# EAGLE board arduino_isp_shield (EAGLE 7.2.0)
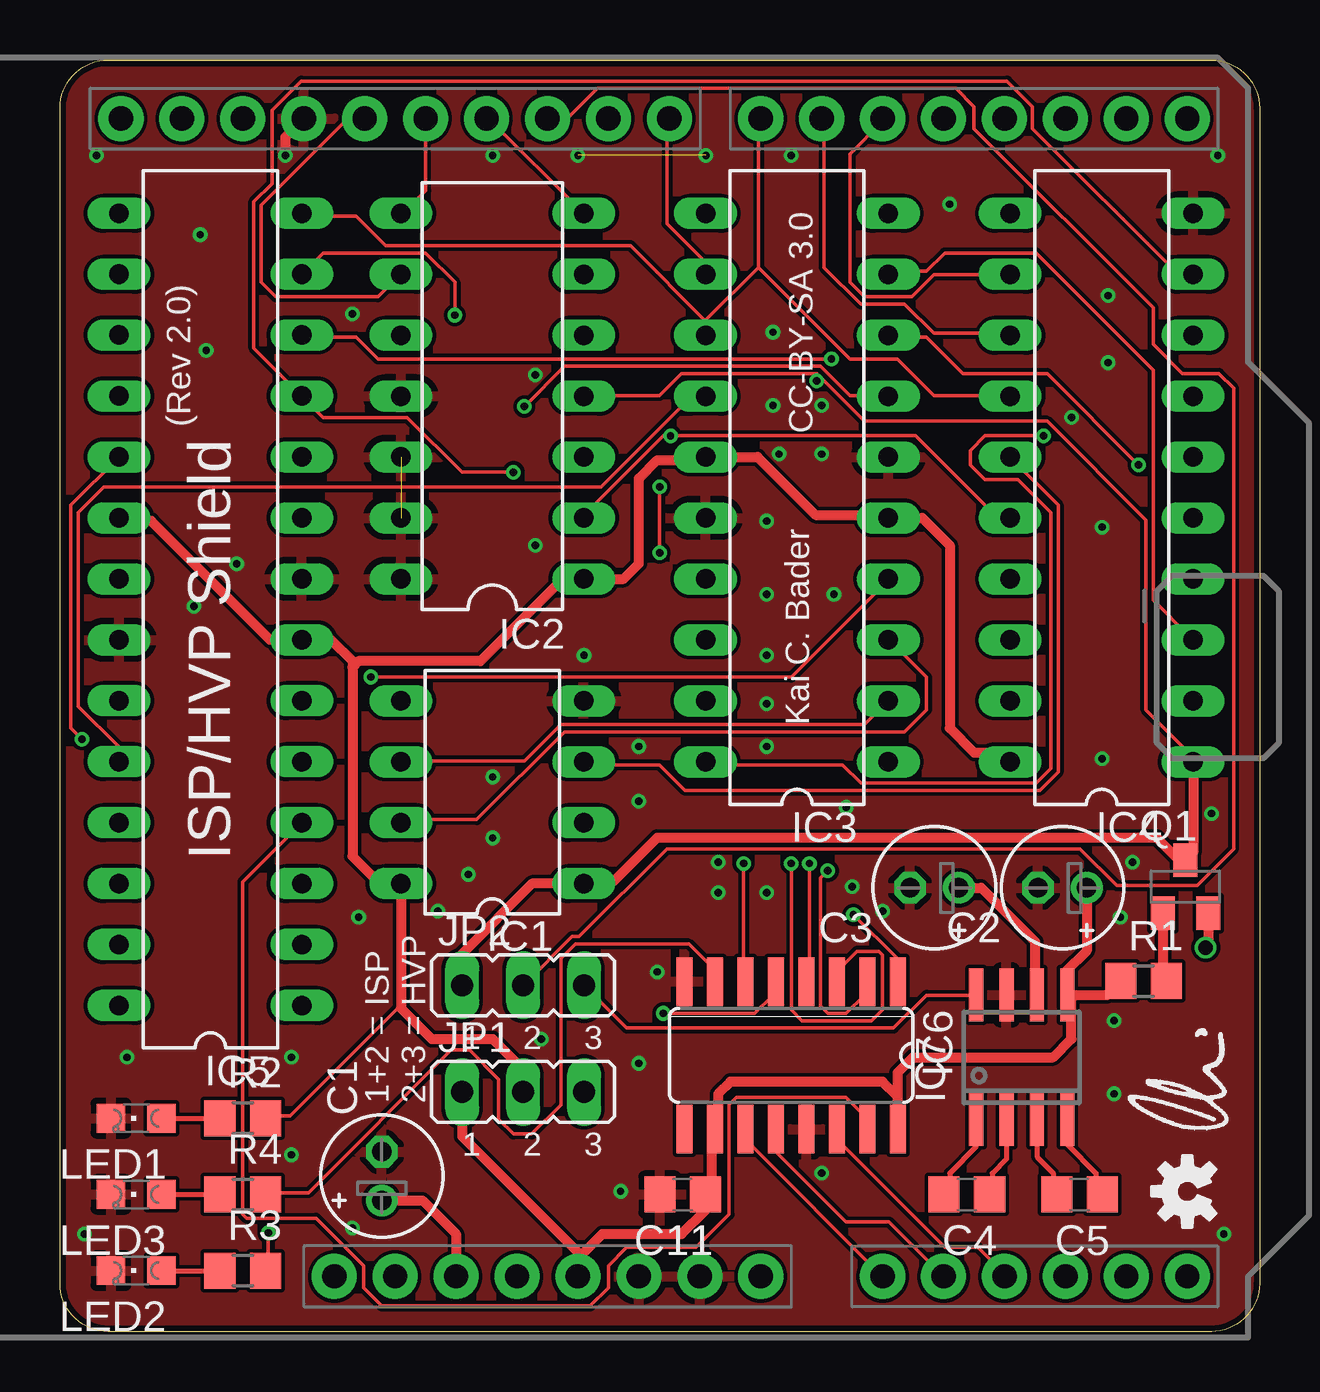
[diagram p0: board, top side]
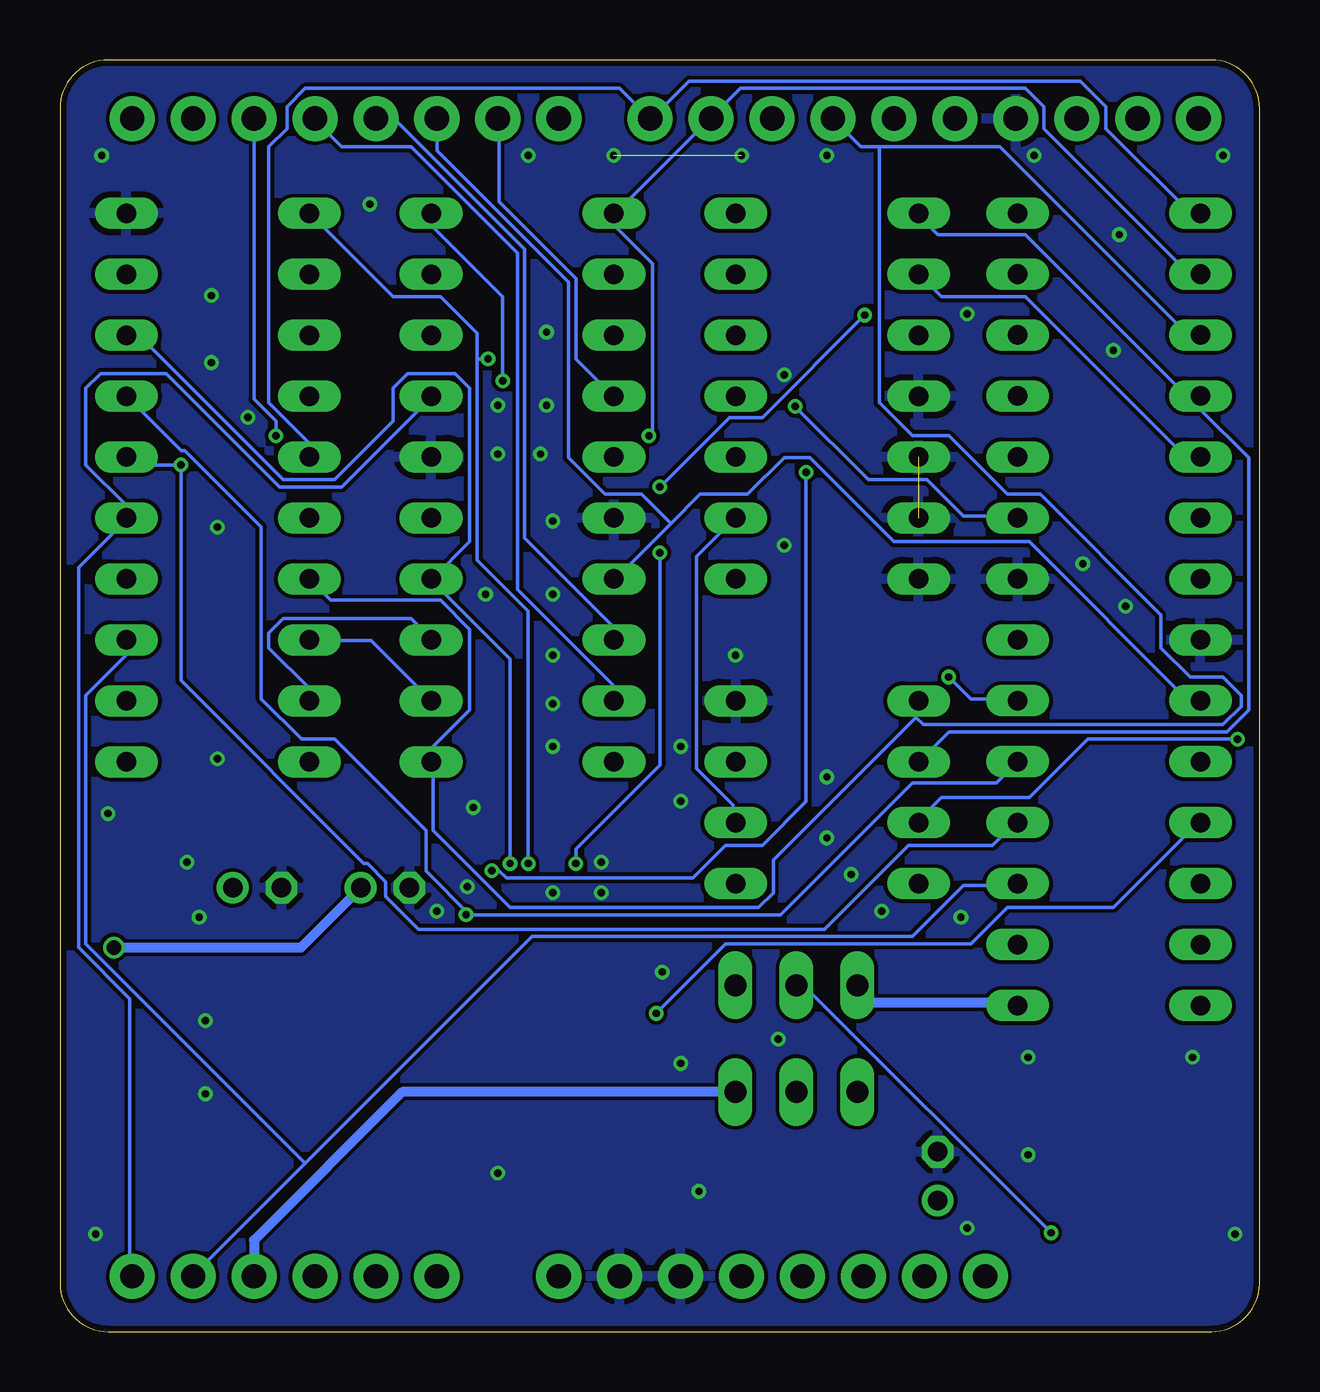
[diagram p1: board, bottom side, seen from below]

Size 50 x 53 mm. Coordinates in mm from the lower left corner, seen from the top.
Outline: 0,2 0,51 arc-90 2,53 48,53 arc-90 50,51 50,2 arc-90 48,0 2,0 arc-90 0,2
Copper layers (1*16): Top 0.035mm / dielectric 1.5mm / Bottom 0.035mm
Design rules "SeeedStudio_2layer_DRU_no_angle_20140221": minimum track width 6mil, minimum drill 12mil, track to track 6mil, track to pad 6mil, pad to pad 6mil, via to via 6mil, smd to smd 0mil, copper to edge 10mil, drill to drill 10mil, minimum pad ring 10mil, minimum via ring 6mil, stop-mask expansion 2mil, vias tented up to drill 100mil, thermal gap 10mil

## Footprints (pad centres in the part's own frame; a part is rotated, then mirrored left to right if it is on the bottom)
E2-5 = drill 0.813 pad 1.27: + -1.016,0 | drill 0.813 pad 1.27 octagon: - 1.016,0
C0805 = smd 1.3 x 1.5: 1 -0.95,0; 2 0.95,0
DIL08 = drill 0.813 long: 1 -3.81,-3.81; 2 -1.27,-3.81; 3 1.27,-3.81; 4 3.81,-3.81; 5 3.81,3.81; 6 1.27,3.81; 7 -1.27,3.81; 8 -3.81,3.81
DIL14 = drill 0.813 long: 1 -7.62,-3.81; 2 -5.08,-3.81; 3 -2.54,-3.81; 4 0,-3.81; 5 2.54,-3.81; 6 5.08,-3.81; 7 7.62,-3.81; 8 7.62,3.81; 9 5.08,3.81; 10 2.54,3.81; 11 0,3.81; 12 -2.54,3.81; 13 -5.08,3.81; 14 -7.62,3.81
DIL20 = drill 0.813 long: 1 -11.43,-3.81; 2 -8.89,-3.81; 3 -6.35,-3.81; 4 -3.81,-3.81; 5 -1.27,-3.81; 6 1.27,-3.81; 7 3.81,-3.81; 8 6.35,-3.81; 9 8.89,-3.81; 10 11.43,-3.81; 11 11.43,3.81; 12 8.89,3.81; 13 6.35,3.81; 14 3.81,3.81; 15 1.27,3.81; 16 -1.27,3.81; 17 -3.81,3.81; 18 -6.35,3.81; 19 -8.89,3.81; 20 -11.43,3.81
DIL28 = drill 0.813 long: 1 -11.43,-3.81; 2 -8.89,-3.81; 3 -6.35,-3.81; 4 -3.81,-3.81; 5 -1.27,-3.81; 6 1.27,-3.81; 7 3.81,-3.81; 8 6.35,-3.81; 9 8.89,-3.81; 10 11.43,-3.81; 11 13.97,-3.81; 12 16.51,-3.81; 13 19.05,-3.81; 14 21.59,-3.81; 15 21.59,3.81; 16 19.05,3.81; 17 16.51,3.81; 18 13.97,3.81; 19 11.43,3.81; 20 8.89,3.81; 21 6.35,3.81; 22 3.81,3.81; 23 1.27,3.81; 24 -1.27,3.81; 25 -3.81,3.81; 26 -6.35,3.81; 27 -8.89,3.81; 28 -11.43,3.81
SO16 = smd 0.66 x 2.032: 1 -4.445,-3.073; 2 -3.175,-3.073; 3 -1.905,-3.073; 4 -0.635,-3.073; 5 0.635,-3.073; 6 1.905,-3.073; 7 3.175,-3.073; 8 4.445,-3.073; 9 4.445,3.073; 10 3.175,3.073; 11 1.905,3.073; 12 0.635,3.073; 13 -0.635,3.073; 14 -1.905,3.073; 15 -3.175,3.073; 16 -4.445,3.073
SO08 = smd 0.6 x 2.2: 1 -1.905,-2.6; 2 -0.635,-2.6; 3 0.635,-2.6; 4 1.905,-2.6; 5 1.905,2.6; 6 0.635,2.6; 7 -0.635,2.6; 8 -1.905,2.6
JP2 = drill 0.914 long: 1 -2.54,0; 2 0,0; 3 2.54,0
CHIPLED_0805 = smd 1.2 x 1.2: A 0,-1.05; C 0,1.05
UNO_R3_SHIELD = drill 1.016 pad 1.88: 3.3V 50.8,26.67; 5V 50.8,29.21; A0 50.8,41.91; A1 50.8,44.45; A2 50.8,46.99; A3 50.8,49.53; A4 50.8,52.07; A5 50.8,54.61; AREF 2.54,15.24; D2 2.54,49.53; D3 2.54,46.99; D4 2.54,44.45; D5 2.54,41.91; D6 2.54,39.37; D7 2.54,36.83; D8 2.54,33.02; D9 2.54,30.48; D10 2.54,27.94; D11 2.54,25.4; D12 2.54,22.86; D13 2.54,20.32; GND@0 50.8,31.75; GND@1 50.8,34.29; GND@2 2.54,17.78; IOREF 50.8,21.59; NC 50.8,19.05; RES 50.8,24.13; RX 2.54,54.61; SCL 2.54,10.16; SDA 2.54,12.7; TX 2.54,52.07; VIN 50.8,36.83
SOT23-BEC = smd 1 x 1.4: B -0.95,-1.1; C 0,1.1; E 0.95,-1.1
R0805 = smd 1.3 x 1.5: 1 -0.95,0; 2 0.95,0

## Placement (x,y rotation side)
C1  10uF  [E2-5]  13.41,6.48 90 top
C2  4.7uF  [E2-5]  41.78,18.5 180 top
C3  4.7uF  [E2-5]  36.45,18.5 180 top
C4  0.22uF  [C0805]  37.8,5.71 180 top
C5  0.22uF  [C0805]  42.5,5.71 180 top
C11  0.1uF  [C0805]  25.95,5.71 180 top
IC1  ATtiny13/15/25/45/85  [DIL08]  18.02,22.48 90 top
IC2  ATtiny24/44/84  [DIL14]  18.02,38.99 90 top
IC3  TINY26/261/461/861  [DIL20]  30.72,35.18 90 top
IC4  ATtiny2313/4313  [DIL20]  43.42,35.18 90 top
IC5  ATMEGA328  [DIL28]  6.27,25.02 90 top
IC6  74HCT595D  [SO16]  30.48,11.51 180 top
IC7  MAX662A  [SO08]  40.09,11.43 0 top
JP1  [JP2]  19.3,9.99 0 top
JP2  [JP2]  19.3,14.43 0 top
LED1  [CHIPLED_0805]  3.17,8.89 90 top
LED2  [CHIPLED_0805]  3.17,2.54 90 top
LED3  [CHIPLED_0805]  3.17,5.71 90 top
PINS  UNO_R3_SHIELDV1  [UNO_R3_SHIELD]  -7.62,53.1 270 top
Q1  BC858BSMD  [SOT23-BEC]  46.91,18.54 0 top
R1  47k  [R0805]  45.16,14.61 0 top
R2  220  [R0805]  7.62,8.89 0 top
R3  220  [R0805]  7.62,2.54 0 top
R4  220  [R0805]  7.62,5.71 0 top
U$1  [OSHW-LOGO-S]  46.99,5.84 90 top
U$3  [KAI-LOGO-M]  48.9,8.26 90 top

## Library data of the parts
C1-C5 C11 R1-R4 = rcl
IC1 = kaibader; OC_FARNELL: unknown; OC_NEWARK: unknown
IC2-IC5 IC7 PINS U$1 U$3 = kaibader
IC6 = 74xx-eu
JP1 JP2 = jumper
LED1-LED3 = led
Q1 = transistor-pnp

## Nets
220: LED2.A R3.1
+5V: IC1.8 IC2.1 IC3.5 IC3.15 IC4.20 IC5.7 IC5.20 JP1.2 R2.2
A0_SCK: IC6.11 PINS.A0
A1_RCK: IC6.12 PINS.A1
A2_SER: IC6.14 PINS.A2
A3_POWER: JP1.3 PINS.A3
A4: IC3.9 IC4.3 IC5.3 PINS.A4
A5: IC3.7 IC4.5 IC5.9 PINS.A5
AREF: IC5.21
D2: IC3.20 PINS.D2
D3: IC3.19 PINS.D3
D4: IC3.18 PINS.D4
D5: IC3.17 IC4.12 IC5.23 PINS.D5
D6: IC3.14 IC4.13 IC5.24 PINS.D6
D7: IC3.13 IC4.14 IC5.14 PINS.D7
D8: IC1.3 IC3.12 IC4.15 IC5.15 PINS.D8
D9: IC1.2 IC2.2 IC3.11 IC4.16 IC5.16 PINS.D9
D10: JP2.2 PINS.D10 R3.2
D10_RESET: IC1.1 IC2.4 IC3.10 IC4.1 IC5.1 JP2.1 Q1.C
D11_MOSI: IC1.5 IC2.7 IC3.1 IC4.17 IC5.17 PINS.D11
D12_MISO: IC1.6 IC2.8 IC3.2 IC4.18 IC5.18 PINS.D12
D13_SCK: IC1.7 IC2.9 IC3.3 IC4.19 IC5.19 PINS.D13
GND: C1.- C2.- C3.- C11.2 IC1.4 IC2.11 IC2.12 IC2.13 IC2.14 IC3.6 IC3.16 IC4.10 IC5.8 IC5.22 IC6.8 IC6.13 IC7.7 LED1.C LED2.C LED3.C PINS.GND@0 PINS.GND@1 PINS.GND@2
N$1: IC7.8 JP2.3
N$2: C1.+ PINS.RES
N$3: Q1.B R1.2
N$4: C5.1 IC7.4
N$5: C5.2 IC7.3
N$6: C4.1 IC7.2
N$7: C4.2 IC7.1
N$8: LED1.A R2.1
N$10: LED3.A R4.1
Q0: IC3.8 IC4.6 IC5.4 IC6.15
Q1: IC4.7 IC5.5 IC6.1
Q2: IC4.9 IC5.11 IC6.2
Q3: IC4.11 IC5.12 IC6.3
Q4: IC3.4 IC4.8 IC5.6 IC6.4
Q5: IC5.25 IC6.5
Q6: IC5.13 IC6.6
Q7: IC6.7 R4.2
RX: PINS.RX
TX: PINS.TX
VCC: C2.+ C11.1 IC6.10 IC6.16 IC7.5 JP1.1 PINS.5V R1.1
VOUT: C3.+ IC7.6 Q1.E

## Tracks (layer width: path | path; a pad name or v marks a point on that pad's centre or on a via)
220
  Top 0.203: LED2.A R3.1
+5V
  Top 0.152: R2.2 8.69,8.99 9.6,8.99 14.02,13.41 14.21,13.48
  Top 0.406: JP1.2 19.3,10.92 18.03,12.19 15.49,12.19 14.21,13.48 IC1.8 14.08,18.8 13.21,18.8 12.19,19.81 12.19,27.69 | 12.19,27.69 12.19,27.94 11.3,28.83 IC5.7 8.76,28.83 3.81,33.78 2.59,33.78 IC5.20 | 12.19,27.69 12.45,27.94 17.53,27.94 20.95,31.37 IC2.1 23.5,31.37 24.13,32 24.13,35.56 24.89,36.32 26.78,36.32 IC3.15 29.08,36.45 31.5,34.04 34.4,34.04 IC3.5 35.94,33.91 37.08,32.77 37.08,25.15 38.1,24.13 39.23,24.13 IC4.20
A0_SCK
  Top 0.152: IC6.11 28.65,8.38 28.65,7.92 34.29,2.29 PINS.A0
A1_RCK
  Top 0.152: IC6.12 29.84,7.49 32.77,4.57 34.56,4.57 PINS.A1
A2_SER
  Top 0.152: IC6.14 32.46,8.38 32.46,7.92 36.88,3.5 38.25,3.5 39.32,2.44 PINS.A2
A3_POWER
  Bottom 0.406: JP1.3 35.73,9.99 41.91,3.81 PINS.A3
A4
  Top 0.152: IC3.9 34.59,44.2 36.12,44.2 36.88,44.96 40.69,44.96 45.57,40.08 45.57,30.48 47.09,28.96 IC4.3
  Bottom 0.152: 39.78,7.01 44.35,2.44 PINS.A4 | 39.78,7.01 30.33,16.46 14.48,16.46 12.34,18.59 10.21,18.59 IC5.3 | 39.78,7.01 48.92,16.15 48.92,26.52 47.24,28.19 47.24,28.8 IC4.3
A5  (via drill 0.3)
  Top 0.152: v19.36,38.56 21.03,40.23 31.7,40.23 32.92,39.01 34.44,39.01 IC3.7
  Bottom 0.152: IC3.7 34.59,38.86 38.25,35.2 40.84,35.2 45.57,39.93 48.31,39.93 48.92,39.32 48.92,36.12 47.24,34.44 47.24,33.98 IC4.5 47.24,33.83 49.23,31.85 49.23,16 47.09,13.87 47.09,2.44 PINS.A5 | v19.36,38.56 16.31,35.51 13.87,35.51 12.34,33.98 10.21,33.98 IC5.9
D2  (via drill 0.3)
  Top 0.152: v41,37.34 38.56,37.34 37.95,36.73 37.95,36.12 38.56,35.51 39.93,35.51 41.3,34.14 41.3,23.47 40.69,22.86 33.38,22.86 32.61,23.62 26.98,23.62 IC3.20
  Bottom 0.152: v41,37.34 41,37.95 41.91,38.86 PINS.D2
D3
  Bottom 0.152: IC3.19 26.98,26.36 26.98,26.98 30.94,30.94 30.94,44.96 35.36,49.38 38.25,49.38 39.32,50.44 PINS.D3
D4
  Bottom 0.152: IC3.18 26.98,28.96 26.98,29.41 30.63,33.07 30.63,45.11 35.97,50.44 36.73,50.44 PINS.D4
D5
  Top 0.152: IC4.12 39.47,44.04 36.42,44.04 35.51,43.13 33.53,43.13 32.92,43.74 32.92,49.07 34.29,50.44 PINS.D5
  Bottom 0.152: 24.54,33.68 26.82,31.39 IC3.17 | 24.54,33.68 23.32,34.9 21.34,34.9 19.81,36.42 18.75,36.42 15.24,32.92 9.6,32.92 3.05,26.36 2.59,26.36 IC5.23 | PINS.D5 34.29,49.23 28.8,43.74 28.8,36.42 27.28,34.9 25.76,34.9 24.54,33.68
D6
  Top 0.152: IC4.13 39.47,41.6 36.42,41.6 35.2,42.82 33.38,42.82 31.85,44.35 31.85,50.44 PINS.D6 | IC5.24 2.44,23.77 2.44,24.38 0.76,26.06 0.76,34.14 1.83,35.2 22.55,35.2 26.21,38.86 26.82,38.86 IC3.14
  Bottom 0.152: PINS.D6 31.7,50.44 31.7,47.09 28.5,43.89 28.5,40.54 26.98,39.01 IC3.14
D7
  Top 0.152: 26.98,42.06 26.98,42.22 29.11,44.35 | 26.98,42.06 26.98,41.6 IC3.13 26.98,42.06 | 29.11,44.35 29.11,50.44 PINS.D7 | 26.98,42.06 23.77,45.26 13.56,45.26 12.34,46.48 10.21,46.48 IC5.14 | 29.11,44.35 32.92,40.54 34.9,40.54 36.42,39.01 39.47,39.01 IC4.14
D8
  Top 0.152: IC1.3 21.95,23.62 24.99,23.62 26.06,22.55 40.84,22.55 41.6,23.32 41.6,34.44 39.62,36.42 IC4.15 | IC3.12 26.82,44.2 26.82,44.65 25.3,46.18 25.3,50.44 PINS.D8
  Bottom 0.152: IC5.15 2.59,46.63 2.9,46.63 6.4,50.14 6.4,51.05 7.47,52.12 23.77,52.12 25.3,50.6 PINS.D8 25.45,50.6 26.67,51.82 39.78,51.82 40.54,51.05 40.54,50.14 41.3,49.38 41.3,38.71 39.62,37.03 39.62,36.58 IC4.15
D9  (via drill 0.3)
  Top 0.152: IC4.16 39.47,33.98 39.01,33.98 35.66,37.34 v25.45,37.34 25.15,37.34 21.79,33.98 IC2.2
  Bottom 0.152: 22.86,50.6 21.64,51.82 9.75,51.82 8.99,51.05 8.99,50.14 3.05,44.2 2.59,44.2 IC5.16 | 22.86,50.6 26.82,46.63 IC3.11 26.82,46.48 26.82,46.02 25.3,44.5 25.3,37.49 v25.45,37.34 | 22.86,50.6 PINS.D9 | IC1.2 21.95,21.34 21.95,21.95 23.47,23.47 23.47,32.31 21.95,33.83 IC2.2
D10  (via drill 0.3)
  Top 0.152: v8.69,4.12 8.69,2.59 R3.2 | PINS.D10 20.42,50.6 21.18,50.6 22.4,51.82 37.34,51.82 38.1,51.05 38.1,50.14 45.57,42.67 45.57,41.15 46.79,39.93 48.31,39.93 48.92,39.32 48.92,20.12 47.4,18.59 44.04,18.59 42.52,20.12 25.3,20.12 21.64,16.46 21.34,16.46 19.36,14.48 JP2.2
  Bottom 0.152: v8.69,4.12 18.9,14.33 19.2,14.33 JP2.2
D10_RESET  (via drill 0.3)
  Top 0.152: 31.7,39.78 33.53,37.95 41.15,37.95 45.26,33.83 45.26,25.91 47.24,23.93 IC4.1 | 31.7,39.78 31.55,39.93 25.91,39.93 24.99,39.01 21.95,39.01 IC2.4 | 31.7,39.78 v31.55,39.62
  Top 0.406: IC4.1 47.23,19.96 Q1.C 46.65,19.64 45.72,20.57 24.89,20.57 23.11,18.8 21.96,18.8 IC1.1 19.68,18.67 16.76,15.75 JP2.1
  Bottom 0.152: v31.55,39.62 31.55,43.13 34.44,46.02 34.44,46.48 IC3.10
  Bottom 0.406: JP2.1 16.76,13.97 16.51,13.72 10.2,13.72 IC5.1
D11_MOSI
  Top 0.152: IC2.7 21.79,46.63 17.83,50.6 PINS.D11
  Bottom 0.152: 15.85,49.38 16.61,49.38 17.68,50.44 PINS.D11 | 15.85,49.38 10.82,49.38 3.05,41.6 2.59,41.6 IC5.17 | IC4.17 39.47,31.24 38.71,30.48 34.14,30.48 32.92,29.26 32.92,25.91 34.44,24.38 34.44,23.77 IC3.1 34.44,23.62 34.44,20.88 31.24,17.68 20.88,17.68 20.27,18.29 20.27,19.66 14.33,25.6 | 14.33,25.6 14.33,26.21 IC1.5 | 15.85,49.38 15.85,38.71 14.48,37.34 12.95,37.34 10.52,34.9 9.14,34.9 4.12,29.87 4.12,28.5 2.9,27.28 1.52,27.28 0.76,26.52 0.76,26.06 1.52,25.3 14.02,25.3 14.33,25.6
D12_MISO
  Top 0.152: PINS.D12 15.24,47.55 14.33,46.63 IC2.8 | IC1.6 14.33,23.77 19.36,23.77 20.88,25.3 33.53,25.3 34.44,26.21 IC3.2
  Bottom 0.152: IC2.8 14.17,46.48 13.41,45.72 9.75,45.72 3.05,39.01 2.59,39.01 IC5.18 2.44,38.86 2.44,38.41 0.46,36.42 0.46,25.91 1.37,24.99 12.95,24.99 14.17,23.77 IC1.6 | IC4.18 39.47,28.8 37.03,28.8 34.59,26.36 IC3.2
D13_SCK  (via drill 0.3)
  Top 0.152: PINS.D13 12.65,50.44 11.89,50.44 8.38,46.94 8.38,43.74 8.99,43.13 13.26,43.13 14.17,44.04 IC2.9 | IC1.7 14.33,21.34 17.37,21.34 21.03,24.99 35.2,24.99 36.12,25.91 36.12,27.28 34.59,28.8 IC3.3 | v0.91,24.69 0.46,25.15 0.46,34.44 2.44,36.42 IC5.19
  Bottom 0.152: IC5.19 2.59,36.58 3.2,36.58 9.75,43.13 13.26,43.13 14.17,44.04 IC2.9 | IC4.19 39.62,26.36 39.62,26.82 41.3,28.5 41.3,29.11 40.69,29.72 35.36,29.72 34.59,28.96 IC3.3 | v0.91,24.69 7.16,24.69 9.6,22.25 13.26,22.25 14.17,21.34 IC1.7
GND  (via drill 0.3 pad 0.61)  (2 unrouted)
  Top 0.406: v9.4,49.02 9.4,49.8 PINS.GND@2
  other vias: 31.75,6.6 24.89,14.99 21.84,28.19 19.81,32.77 29.46,33.78 24.13,11.18 23.37,5.84 2.79,11.43 19.81,39.88 21.59,49.02 18.03,49.02 12.19,42.42 43.43,23.88 29.97,36.58 43.43,33.53 37.08,46.99 43.69,43.18 43.69,40.39 29.72,41.66 29.72,38.61 9.65,11.43 9.65,7.37 12.19,4.32 44.2,17.27 1.52,49.02 6.1,40.89 7.37,32 5.59,30.23 5.84,45.72 31.75,38.61 30.48,49.02 26.92,49.02 43.94,9.91 43.94,12.95 29.46,30.73 29.46,28.19 29.46,26.16 29.46,24.38 18.03,23.11 24.13,22.1 18.03,20.57 17.02,19.05 12.45,17.27 15.75,17.53 27.43,19.56 27.43,18.29 29.46,18.29 32.77,21.84 20.07,12.19 48.01,21.59 48.26,49.02 48.51,4.06 1.02,4.06 44.7,19.56 24.13,24.38 31.75,36.58 32.26,30.73 33.02,18.54 34.29,17.53 42.16,38.1
  pour Bottom: 50,0 0,0 0,53 50,53
  pour Top: 0,53 50,53 50,0 0,0
N$1
  Top 0.152: IC7.8 38.1,14.02 36.12,14.02 34.75,12.65 23.62,12.65 21.95,14.33 JP2.3
N$2
  Top 0.406: C1.+ 15.11,5.46 16.51,4.06 PINS.RES
N$3
  Top 0.406: Q1.B 45.96,14.76 R1.2
N$4
  Top 0.203: IC7.4 41.99,7.79 43.18,6.6 43.18,5.98 C5.1
N$5
  Top 0.203: IC7.3 40.72,7.29 41.4,6.6 41.4,5.86 C5.2
N$6
  Top 0.203: IC7.2 39.45,7.19 38.86,6.6 38.86,5.83 C4.1
N$7
  Top 0.203: IC7.1 38.18,7.7 37.08,6.6 37.08,5.95 C4.2
N$8
  Top 0.203: LED1.A R2.1
N$10
  Top 0.203: LED3.A R4.1
Q0  (via drill 0.3)
  Top 0.152: v44.96,36.12 41.15,39.93 37.64,39.93 36.12,41.45 34.59,41.45 IC3.8 | IC6.15 33.53,8.53 33.53,8.99 32.77,9.75 28.19,9.75 27.89,9.45 27.89,4.88 26.52,3.5 23.62,3.5 22.86,2.74 22.86,1.83 22.1,1.07 13.41,1.07 12.65,1.83 12.65,2.74 10.67,4.72 7.77,4.72 7.62,4.88 7.62,18.75 10.06,21.18 IC5.4
  Bottom 0.152: IC4.6 47.09,36.42 46.79,36.12 v44.96,36.12 44.96,27.13 37.34,19.51 37.19,19.51 36.42,18.75 36.42,18.14 35.05,16.76 18.14,16.76 14.63,20.27 11.12,20.27 10.21,21.18 IC5.4
Q1  (via drill 0.3)
  Top 0.152: v33.07,17.37 34.9,15.54 34.9,14.63 IC6.1
  Bottom 0.152: 32.92,17.37 19.96,17.37 14.48,22.86 10.97,22.86 IC5.5 | 32.92,17.37 34.75,19.2 34.75,20.88 38.56,24.69 39.93,24.69 41.6,26.36 41.6,33.53 44.81,36.73 44.96,36.73 47.09,38.86 IC4.7 | 32.92,17.37 v33.07,17.37
Q2  (via drill 0.3)
  Top 0.152: v32,19.2 31.7,18.9 31.7,13.56 32,13.26 32.77,13.26 33.53,14.02 33.53,14.48 IC6.2 | v18.9,35.81 16.76,35.81 14.48,38.1 10.97,38.1 IC5.11 8.08,41 8.08,47.09 8.84,47.85 8.84,50.9 10.06,52.12 39.47,52.12 40.54,51.05 40.54,50.14 46.48,44.2 47.09,44.2 IC4.9
  Bottom 0.152: v32,19.2 31.7,19.2 31.39,18.9 23.62,18.9 22.25,20.27 20.73,20.27 18.9,22.1 v18.9,35.81
Q3  (via drill 0.3)
  Top 0.152: v30.48,19.51 30.48,13.41 30.94,12.95 33.83,12.95 34.29,13.41 34.29,15.7 34.14,15.85 33.22,15.85 32.46,15.09 32.46,14.63 IC6.3 | v32.16,40.54 13.26,40.54 12.34,41.45 10.21,41.45 IC5.12
  Bottom 0.152: v30.48,19.51 30.48,30.02 32.61,32.16 32.61,40.54 | 32.61,40.54 32.61,41.6 34.14,43.13 36.12,43.13 39.47,46.48 IC4.11 | 32.61,40.54 v32.16,40.54
Q4  (via drill 0.3)
  Top 0.152: v31.24,19.51 31.24,14.63 IC6.4 | v12.95,27.28 30.48,27.28 34.44,31.24 IC3.4
  Bottom 0.152: v31.24,19.51 31.24,28.04 34.44,31.24 IC3.4 34.44,31.39 32.92,32.92 32.92,39.32 33.53,39.93 35.51,39.93 36.12,39.32 36.12,37.95 38.56,35.51 40.69,35.51 46.63,41.45 47.09,41.45 IC4.8 | v12.95,27.28 12.04,26.36 10.21,26.36 IC5.6
Q5  (via drill 0.3)
  Top 0.152: v25.15,13.26 28.96,13.26 29.72,14.02 29.72,14.48 IC6.5
  Bottom 0.152: v25.15,13.26 22.25,16.15 12.04,16.15 10.52,17.68 6.1,17.68 2.59,21.18 IC5.25
Q6  (via drill 0.3)
  Top 0.152: v28.5,19.51 28.5,14.63 IC6.6 | v24.99,35.2 v24.99,32.46 | v16.46,42.37 16.46,43.74 15.24,44.96 10.97,44.96 10.21,44.2 IC5.13
  Bottom 0.152: v28.5,19.51 28.5,20.12 24.99,23.62 v24.99,32.46 | v24.99,35.2 22.1,38.1 20.73,38.1 v16.46,42.37
Q7
  Top 0.152: R4.2 8.69,5.79 10.36,5.79 16.31,11.73 17.07,11.73 18.29,10.52 18.29,8.84 18.9,8.23 19.66,8.23 20.88,9.45 20.88,15.54 21.49,16.15 26.21,16.15 27.28,15.09 27.28,14.63 IC6.7
VCC
  Top 0.406: PINS.5V 21.59,3.05 21.72,3.17 | 21.72,3.17 22.61,4.06 25.91,4.06 26.92,5.08 26.92,5.7 C11.1 26.91,5.82 27.18,6.1 27.18,8.31 IC6.10 27.43,8.56 27.43,9.91 27.94,10.41 34.29,10.41 34.92,9.78 IC6.16 34.92,10.79 35.56,11.43 41.4,11.43 42.16,12.19 42.16,13.86 IC7.5 | JP1.1 16.76,8.13 21.72,3.17 | IC7.5 43.64,14.03 R1.1 44.07,14.61 43.94,14.48 | C2.+ 42.8,15.88 41.91,14.99 41.91,14.11 IC7.5
VOUT  (via drill 0.6)
  Top 0.406: C3.+ 38.4,18.5 40.64,16.26 40.64,14.11 IC7.6 | Q1.E 47.86,16.11 v47.75,16
  Bottom 0.406: v47.75,16 39.96,16 C3.+

## Text on the board
tPlace: (Rev 2.0) | CC-BY-SA 3.0 | Kai C. Bader | ISP/HVP Shield | 1+2 = ISP / 2+3 = HVP